# Allegro board LowPassButterworthOne.brd
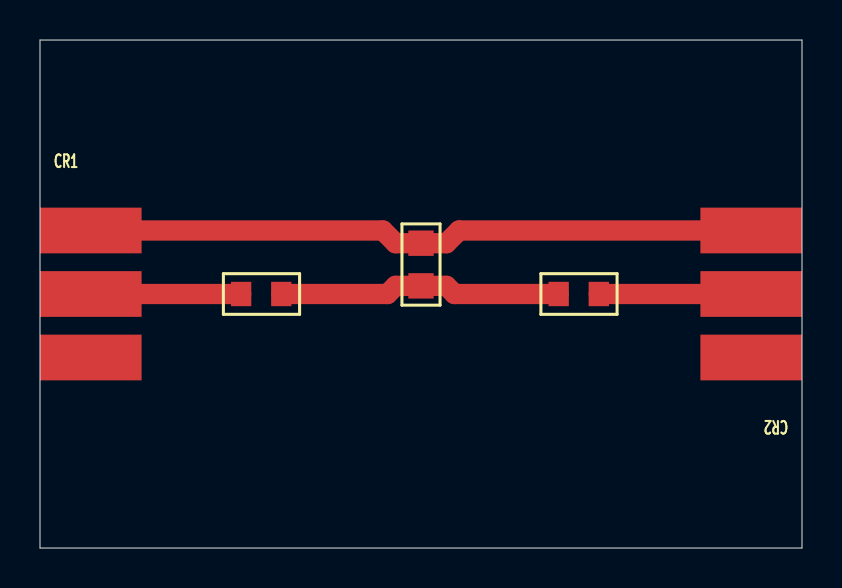
[diagram p0: board, top side]
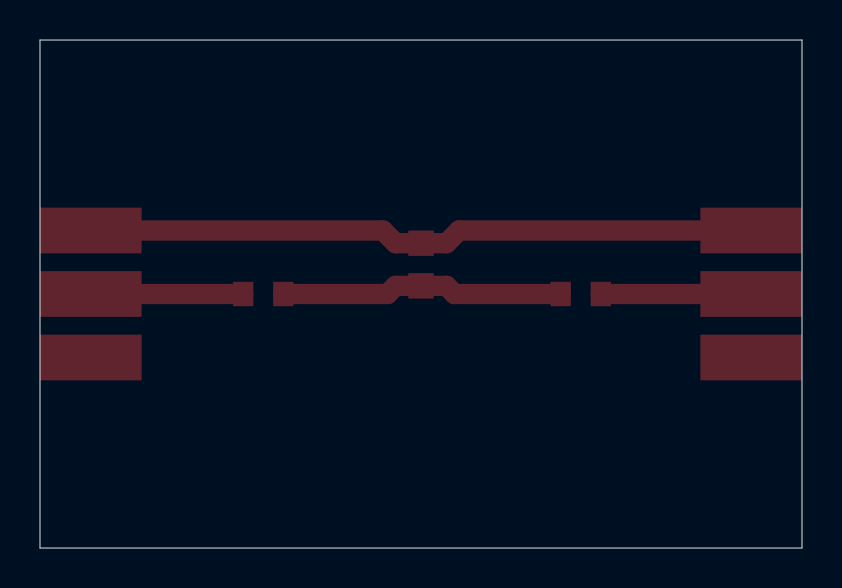
[diagram p1: board, bottom side, seen from below]

Outline 38.1 x 25.4 mm; copper layers: TOP, BOTTOM. Coordinates in mm from the lower left corner of the outline.
Outline path: 0,25.4 38.1,25.4 38.1,0 0,0 0,25.4

## Design rules (mm)
constraint set DEFAULT: min track width 0.127

## Placement (name value [footprint] x y rotation side)
C2  219.5pF  [SMC0805]  19.05 15.24 270 top
CR1  COAX RECEPTACLE  [MOLEX_SMA]  0 12.7 0 top
CR2  COAX RECEPTACLE  [MOLEX_SMA]  38.1 12.7 180 top
L1  0.274uH  [SML0805]  12.07 12.7 180 top
L3  0.274uH  [SML0805]  27.94 12.7 180 top

## Library data of the parts
C2 = C
CR1 CR2 = COAX RECEPTACLE
L1 L3 = L

## Footprints (pads in the part's own frame, mm; a bottom-side part is the same pattern mirrored in y, then rotated)
MOLEX_SMA
  rect 5.08x2.286 smd: 1(2.54,3.175) 2(2.54,0) 3(2.54,-3.175)
SMC0805
  rect 1.27x1.27 smd: 1(0,0) 2(2.134,0)
SML0805
  rect 1.016x1.219 smd: 1(0,0) 2(2.007,0)

## Nets
0: C2.1 CR1.1 CR1.3(SHIELD 2) CR2.1 CR2.3(SHIELD 2)
N01508: C2.2 L1.1 L3.2
N01644: CR2.2 L3.1
N02128: CR1.2 L1.2

## Routing (per net, layer and track width the routed paths; a pad name or vN(x,y) marks a point on that pad's centre or on a via; arc(x,y) is an arc through that point)
0: length 33.5
  TOP w1.016: CR2.3 20.96,15.88 20.32,15.24 C2.1 17.78,15.24 17.14,15.88 2.54,15.88
N01508: length 14.2
  TOP w1.016: L1.1 17.37,12.7 17.78,13.11 C2.2 20.32,13.11 20.73,12.7 L3.2
N01644: length 7.6
  TOP w1.016: CR2.2 L3.1
N02128: length 7.5
  TOP w1.016: L1.2 2.54,12.7
